# Altium PCB Adapter_XDS_110.PcbDoc
Units mm, origin at the board's own origin, x right, y up, seen from the top; angles counter-clockwise.
Board outline 19.75 x 41.19 mm, 2 copper layers (Top Layer, Bottom Layer), stack 1.621 mm thick; 12 components, 9 nets, 53 pads, 83 vias.
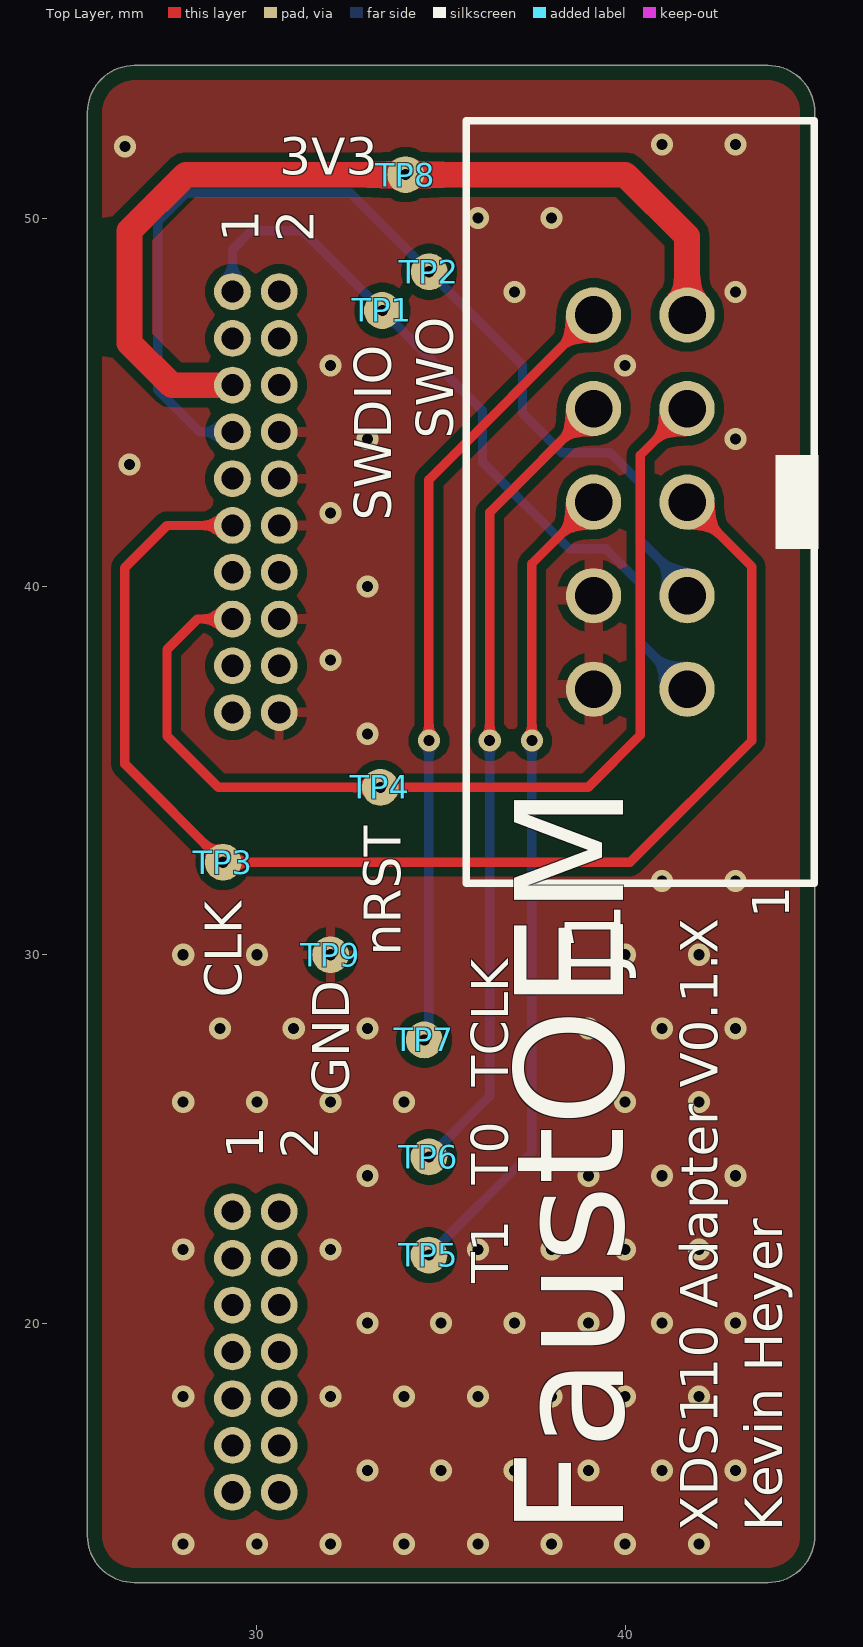
[diagram p0: Top Layer view]
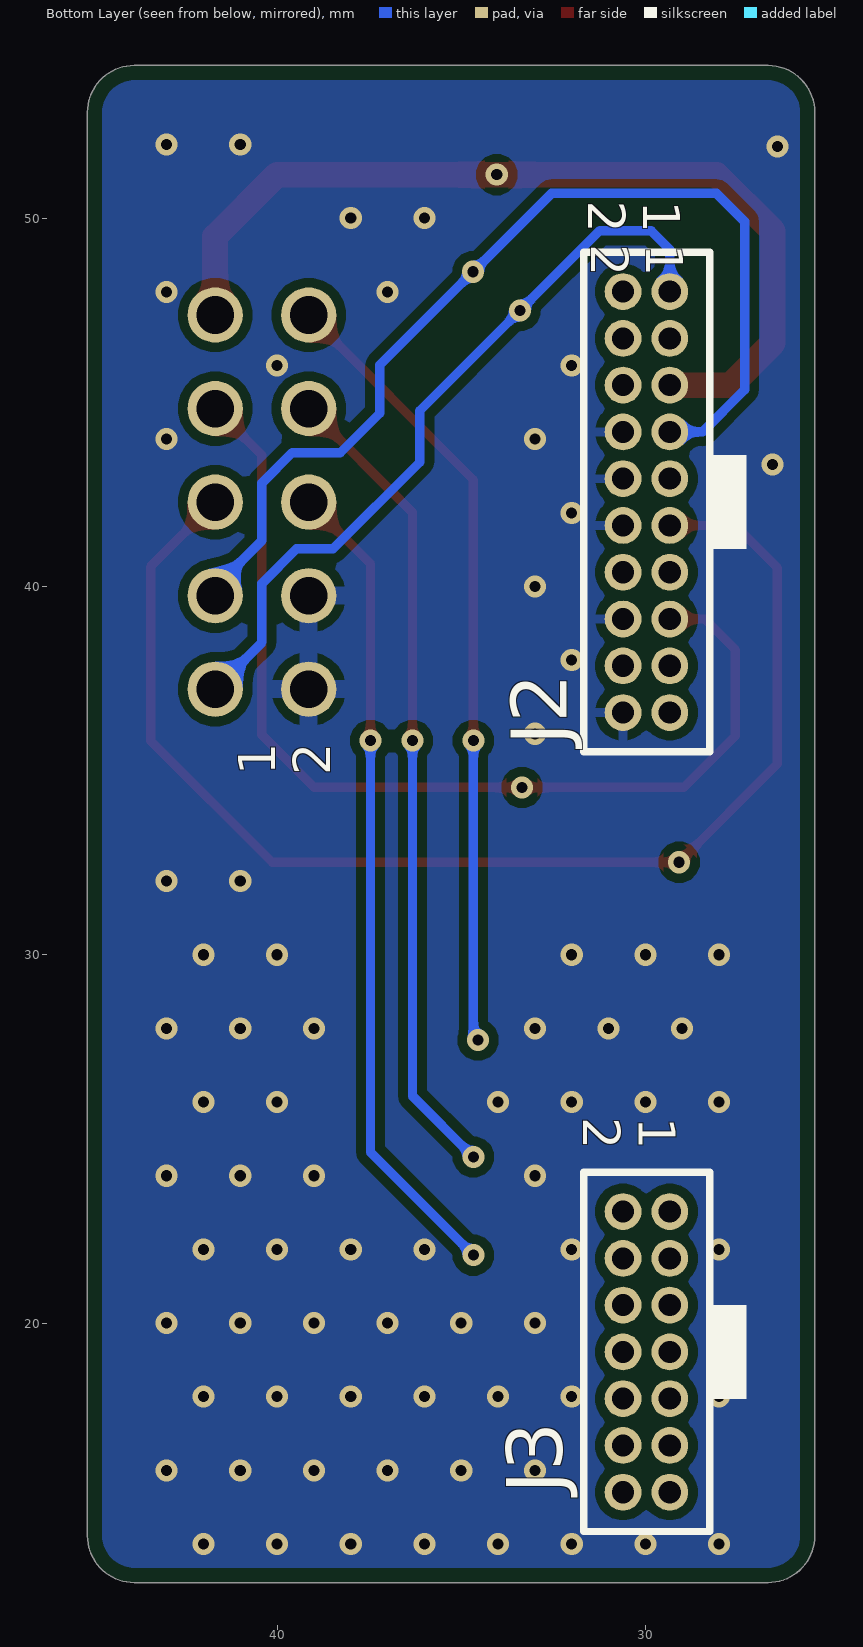
[diagram p1: Bottom Layer view, seen from below]

## Layer stack, top to bottom
Top Solder: solder mask 0.0102, Solder Resist, Dk 3.5
Top Layer: signal copper 0.0356
Dielectric 1: dielectric 1.55, FR-4, Dk 4.8
Bottom Layer: signal copper 0.0356
Bottom Solder: solder mask 0.0102, Solder Resist, Dk 3.5

## Board outline
25.4,14.224 ccw(c26.67,14.224) 26.67,12.954 43.879,12.954 ccw(c43.879,14.224) 45.149,14.224 45.149,52.877 ccw(c43.879,52.877) 43.879,54.147 26.67,54.147 ccw(c26.67,52.877) 25.4,52.877

## Design rules (kind name [scope] priority, off if disabled: settings)
BoardOutlineClearance BoardOutlineClearance_Component [IsComponent] p1: gap=0.254 ignorepadtopadclearanceinfootprint=FALSE except(0: Arc-SplitContinuation Track-SplitContinuation SMDPad-SplitContinuation THPad-SplitContinuation Via-SplitContinuation Fill-SplitContinuation Poly-SplitContinuation Region-SplitContinuation Text-SplitContinuation; 0.4: Track-OutlineEdge SMDPad-OutlineEdge THPad-OutlineEdge Via-OutlineEdge Fill-OutlineEdge Poly-OutlineEdge Region-OutlineEdge)
BoardOutlineClearance [All] p2: gap=0.254 ignorepadtopadclearanceinfootprint=FALSE except(0: Arc-SplitContinuation Track-SplitContinuation SMDPad-SplitContinuation THPad-SplitContinuation Via-SplitContinuation Fill-SplitContinuation Poly-SplitContinuation Region-SplitContinuation Text-SplitContinuation; 0.4: Track-OutlineEdge SMDPad-OutlineEdge THPad-OutlineEdge Via-OutlineEdge Fill-OutlineEdge Poly-OutlineEdge)
Clearance [All] p1: gap=0.254 ignorepadtopadclearanceinfootprint=FALSE except(0: Arc-Hole Track-Hole SMDPad-Hole THPad-Hole Via-Hole Fill-Hole Poly-Hole Region-Hole Text-Hole; 0.127: Arc-Arc Arc-Track Track-Track SMDPad-SMDPad; 0.2: SMDPad-THPad)
ComponentClearance [All] p1: gap=0.1 collisioncheckmode=3 verticalgap=0.254 showdistances=FALSE
HoleSize [All] p1: absolutevalues=TRUE maxlimit=6.3 minlimit=0.2 maxpercent=80.000 minpercent=20.000
HoleToHoleClearance [All] p1: gap=0.5 allowstackedmicrovias=TRUE
MinimumAnnularRing [All] p1: minimumring=0.13
MinimumSolderMaskSliver [All] p1: minsoldermaskwidth=0.05
PlaneConnect [All] p1: planeconnectstyle=Direct reliefexpansion=0.508 reliefentries=4 reliefconductorwidth=0.254 reliefairgap=0.254
PolygonConnect [All] p1: connectstyle=Direct reliefconductorwidth=0.254 reliefentries=4 polygonreliefangle="90 Angle" airgapwidth=0.254
RoutingVias [All] p1: holewidth=0.3 width=0.6 viastyle="Through Hole" minholewidth=0.3 minwidth=0.6 maxholewidth=6.3 maxwidth=6.3
SilkToSilkClearance [All] p1: silktosilkclearance=0
SilkToSolderMaskClearance [IsPad] p1: minsilkscreentomaskgap=0 clearancetoexposedcopper=TRUE
SolderMaskExpansion SolderMaskExpansion_via [isVia] p1: expansion=0.055 istentingtop=TRUE
SolderMaskExpansion SolderMaskExpansion_1 [All] p2: expansion=0.102 istentingtop=FALSE
Width [All] p1: maxlimit=1816.048 minlimit=0.127 preferedwidth=0.254 toplayer_maxwidth=1816.048 minimp=50.000000 maximp=50.000000 favimp=50.000000
23 further rules are at their usual default settings.

## Components (designator, comment, footprint, x,y, rotation, side; value= is the part's Value field where it differs from the comment)
J1 "TAG CONN 10" "CONN HDR RECPT 20 2.54 TH TAG CONNECT 10" 40.412,42.291 r180 top locked
J2 "20021311-00020T4LF" "CONN HDR PLUG 20 1.27 TH XDS110 DEBUG" 29.972,42.291 r0 bottom locked
J3 "20021311-00014T4LF" "CONN HDR PLUG 14 1.27 TH XDS110 AUX" 29.972,19.216 r0 bottom
TP1 "1mm" TESTPOINT_SMT 33.405,47.494 r90 top
TP2 "1mm" TESTPOINT_SMT 34.677,48.546 r90 top
TP3 "1mm" TESTPOINT_SMT 29.083,32.512 r90 top
TP4 "1mm" TESTPOINT_SMT 33.351,34.544 r90 top
TP5 "1mm" TESTPOINT_SMT 34.671,21.844 r90 top
TP6 "1mm" TESTPOINT_SMT 34.671,24.511 r90 top
TP7 "1mm" TESTPOINT_SMT 34.544,27.686 r270 top
TP8 "1mm" TESTPOINT_SMT 34.036,51.181 r270 top
TP9 "1mm" TESTPOINT_SMT 32,30 r270 top

## Footprints (in the part's own frame and the unit in brackets; to place one, negate y for a bottom-side part, rotate by r counter-clockwise, add the part's x,y. Pads: shape width x height; smd on the part's side, far side on the other; paste and mask are expansions set on the pad)
"CONN HDR PLUG 14 1.27 TH XDS110 AUX" [mm]
  round 1 hole 0.6: 1(-0.635,3.81) 2(0.635,3.81) 3(-0.635,2.54) 4(0.635,2.54) 5(-0.635,1.27) 6(0.635,1.27) 7(-0.635,0) 8(0.635,0) 9(-0.635,-1.27) 10(0.635,-1.27) 11(-0.635,-2.54) 12(0.635,-2.54) 13(-0.635,-3.81) 14(0.635,-3.81)
  silkscreen extent -2.72,-4.88 1.7,4.87, body extent -1.5,-4.68 1.5,4.67, height 4.31
"CONN HDR PLUG 20 1.27 TH XDS110 DEBUG" [mm]
  round 1 hole 0.6: 1(-0.635,-5.715) 2(0.635,-5.715) 3(-0.635,-4.445) 4(0.635,-4.445) 5(-0.635,-3.175) 6(0.635,-3.175) 7(-0.635,-1.905) 8(0.635,-1.905) 9(-0.635,-0.635) 10(0.635,-0.635) 11(-0.635,0.635) 12(0.635,0.635) 13(-0.635,1.905) 14(0.635,1.905) 15(-0.635,3.175) 16(0.635,3.175) 17(-0.635,4.445) 18(0.635,4.445) 19(-0.635,5.715) 20(0.635,5.715)
  silkscreen extent -2.72,-6.78 1.7,6.78, body extent -1.5,-6.58 1.5,6.58, height 4.31
"CONN HDR RECPT 20 2.54 TH TAG CONNECT 10" [mm]
  round 1.5 hole 1.02: 1(-1.27,5.08) 2(1.27,5.08) 3(-1.27,2.54) 4(1.27,2.54) 5(-1.27,0) 6(1.27,0) 7(-1.27,-2.54) 8(1.27,-2.54) 9(-1.27,-5.08) 10(1.27,-5.08)
  silkscreen extent -4.82,-10.35 4.73,10.35
TESTPOINT_SMT [mm] "testpoint smt"
  round 1 smd: 1(0,0)

## Part data
J1: library part "CONN HDR RECPT 10 2.54mm TH SWV", "Conn Shrouded Header HDR 10 POS 2.54mm Solder ST Thru-Hole", Color=Black, Manufacturer="On-Shore Technology", Manufacturer Part Number=302-S101, Supplier Part Number 1=ED1543-ND, Category=Connectors, ComponentLink1Description=https://datasheet.ciiva.com/732/302-sxxx-732946.pdf?src-supplier=Digi-Key, ComponentLink1URL=https://datasheet.ciiva.com/732/302-sxxx-732946.pdf?src-supplier=Digi-Key, Connector Type="Male Pin", Contact Plating=Gold, Contact Type="Male Pin", Mount="Through Hole", Number of Positions=10, Number of Rows=2, Packaging=Tray, Pitch=0.1inch, Pricing 1="1=0.29000, 10=0.24800, 100=0.19290, 500=0.16538, 1000=0.13781, 5000=0.11812, 10000=0.11025 (USD)", RoHS=Yes, Row Spacing=0.1inch, Series=302, Stock 1=61558, Supplier 1=Digi-Key, Termination=Solder
J2: library part "CONN HDR RECPT 20 1.27mm TH 20021311-00020T4LF", "Dual Row 20 Position 1.27 mm Board to Board Through Hole Female Socket Connector", Color=Black, Contact Resistance=30mR, Current Rating=1A, Manufacturer 1="Amphenol ICC / FCI", Max Operating Temperature=85°C, Max Voltage Rating (AC)=125V, Min Operating Temperature=-40°C, Package Quantity=45, Supplier Part Number 1=82R8663, Category 1=Connectors, ComponentLink1Description=http://www.alliedelec.com/m/d/a3245b736a91ce97db4107bcd031e553.pdf?src-supplier=Allied+Electronics, ComponentLink1URL=http://www.alliedelec.com/m/d/a3245b736a91ce97db4107bcd031e553.pdf?src-supplier=Allied+Electronics, ComponentLink2Description=https://www.verical.com/server-webapp/html/getDatasheet?partID=356979&src-supplier=Verical, ComponentLink2URL=https://www.verical.com/server-webapp/html/getDatasheet?partID=356979&src-supplier=Verical, ComponentLink3Description=http://portal.fciconnect.com/Comergent/fci/drawing/20021311.pdf?src-supplier=Avnet, ComponentLink3URL=http://portal.fciconnect.com/Comergent/fci/drawing/20021311.pdf?src-supplier=Avnet, ComponentLink4Description=http://portal.fciconnect.com/Comergent//fci/drawing/20021311.pdf?src-supplier=Mouser, ComponentLink4URL=http://portal.fciconnect.com/Comergent//fci/drawing/20021311.pdf?src-supplier=Mouser, ComponentLink5Description=http://www.farnell.com/cad/1750102.pdf?src-supplier=Element14, ComponentLink5URL=http://www.farnell.com/cad/1750102.pdf?src-supplier=Element14, ComponentLink6Description=http://components.arrow.com/part/dataview/48963304S8522655N8314?src-supplier=Arrow+Electronics, ComponentLink6URL=http://components.arrow.com/part/dataview/48963304S8522655N8314?src-supplier=Arrow+Electronics, ComponentLink7Description=http://www.farnell.com/datasheets/2374175.pdf?src-supplier=Farnell, ComponentLink7URL=http://www.farnell.com/datasheets/2374175.pdf?src-supplier=Farnell, ComponentLink8Description=https://media.digikey.com/pdf/Data%20Sheets/FCI%20PDFs/Minitek%20127_Catalog.pdf?src-supplier=Digi-Key, ComponentLink8URL=https://media.digikey.com/pdf/Data%20Sheets/FCI%20PDFs/Minitek%20127_Catalog.pdf?src-supplier=Digi-Key, Connector Type=Receptacle, Contact Material="Copper Alloy,Copper", Contact Plating=Gold, Contact Type="Female Socket", Depth=3mm, Description 1="Dual Row 20 Position 1.27 mm Board to Board Through Hole Female Socket Connector", Gender=Receptacle, Housing Material=Plastic, Length=11.43mm, Manufacturer Part Number 1=20021311-00020T4LF, Mounting Technology="Through Hole", Number of Contacts=20, Number of Positions=20, Number of Rows=2, Orientation=Straight, Packaging=Rail/Tube, Pitch=1.27mm, Radiation Hardening=No, Reach SVHC Compliant=Yes, RoHS 1=Yes, Row Spacing=0.05inch, Series="Minitek 127® 20021311", Supplier 1=Newark, Termination=Solder, Voltage Rating=125V
J3: library part "CONN HDR RECPT 14 1.27mm TH 20021311-00014T4LF", "1.27mm (0.05in.) pitch, Receptacle Top entry, 14 contacts", Color=Black, Contact Resistance=30mR, Current Rating=1A, Manufacturer 1="Amphenol ICC / FCI", Max Operating Temperature=85°C, Max Voltage Rating (AC)=125V, Min Operating Temperature=-40°C, Package Quantity=63, Supplier Part Number 1=39AJ1937, Category 1=Connectors, ComponentLink1Description=https://datasheet.ciiva.com/411/20021311-411141.pdf?src-supplier=Digi-Key, ComponentLink1URL=https://datasheet.ciiva.com/411/20021311-411141.pdf?src-supplier=Digi-Key, ComponentLink2Description=https://datasheet.ciiva.com/13874/20021311-13874918.pdf?src-supplier=Mouser, ComponentLink2URL=https://datasheet.ciiva.com/13874/20021311-13874918.pdf?src-supplier=Mouser, ComponentLink3Description=https://datasheet.ciiva.com/10135/20021311-10135351.pdf?src-supplier=Avnet, ComponentLink3URL=https://datasheet.ciiva.com/10135/20021311-10135351.pdf?src-supplier=Avnet, Connector Type=Receptacle, Contact Material="Copper Alloy", Contact Plating=Gold, Contact Type="Female Socket", Depth=3mm, Description 1="1.27mm (0.05in.) pitch, Receptacle Top entry, 14 contacts", Gender=Female, Housing Material=Plastic, Length=7.62mm, Manufacturer Part Number 1=20021311-00014T4LF, Mounting Technology="Through Hole", Number of Contacts=14, Number of Positions=14, Number of Rows=2, Orientation=Straight, Packaging=Rail/Tube, Pitch=1.27mm, RoHS 1=Yes, RoHS Compliant=Yes, Row Spacing=0.05inch, Series="Minitek 127® 20021311", Supplier 1=Newark, Termination=Solder, Voltage Rating=125V
TP1 TP2 TP3 TP4 TP5 TP6 TP7 TP8 TP9: library part "TP 1mm", "SMT testpoint"

## Via types
v1: diameter 0.6, hole 0.3, Top Layer to Bottom Layer, tented both sides, 83 vias

## Nets (pads, with @x,y where several pads share a name; then routed paths per layer and width w, separated by ;. In a path a pad name is that pad's centre, name@x,y a point inside that pad or via, vN(x,y) a via of type N, cw(c..) or ccw(c..) an arc to the next point about the centre after c; other vN are vias at no path point)
3V3: J1.9 J2.5 TP8.1 | length 25.1
  Top Layer w0.7: J2.5 27.686,45.466 26.543,46.609 26.543,49.657 28.067,51.181 40.005,51.181 41.682,49.504 J1.9@41.682,47.191
  other v1: 34.036,51.181
GND: J1.2 J1.4 J2.8 J2.10 J2.12 J2.16 J2.20 TP9.1
  other v1: 28,14 30,14 32,14 34,14 36,14 38,14 40,14 42,14 33,16 35,16 37,16 39,16 41,16 43,16 28,18 32,18 34,18 36,18 38,18 40,18 42,18 33,20 35,20 37,20 39,20 41,20 43,20 28,22 32,22 36,22 38,22 40,22 42,22 33,24 39,24 41,24 43,24 28,26 30,26 32,26 34,26 40,26 42,26 29,28 31,28 33,28 39,28 41,28 43,28 28,30 30,30 32,30 40,30 42,30 41,32 43,32 33,36 32,38 33,40 32,42 26.543,43.307 33,44 43,44 32,46 40,46 37,48 43,48 36,50 38,50 26.416,51.943 41,52 43,52
nRST: J1.7 J2.15 TP4.1 | length 27.9
  Top Layer w0.254: J2.15 28.39,39.116 27.559,38.286 27.559,35.941 28.956,34.544 38.989,34.544 40.412,35.967 40.412,43.561 J1.7
  other v1: 33.351,34.544
SWCLK: J1.5 J2.11 TP3.1 | length 35.4
  Top Layer w0.254: J2.11 27.559,41.656 26.416,40.513 26.416,35.179 v1(29.083,32.512) 40.132,32.512 43.434,35.814 43.434,40.539 J1.5
SWDIO: J1.1 J2.1 TP1.1 | length 20.6
  Bottom Layer w0.254: J2.1 29.337,49.149 29.845,49.657 31.242,49.657 36.126,44.773 36.126,43.376 38.481,41.021 39.471,41.021 40.412,40.08 40.412,38.481 J1.1
  other v1: 33.405,47.494
SWO: J1.3 J2.7 TP2.1 | length 28.1
  Bottom Layer w0.254: J2.7 28.448,44.196 27.305,45.339 27.305,49.911 28.067,50.673 32.55,50.673 37.211,46.012 37.211,44.704 38.285,43.63 39.593,43.63 40.412,42.811 40.412,41.249 41.682,39.979 J1.3
  other v1: 34.677,48.546
TRACE0: J1.8 TP6.1 | length 22.2
  Top Layer w0.254: v1(36.322,35.814) 36.322,42.011 J1.8
  Bottom Layer w0.254: v1(34.671,24.511) 36.322,26.162 v1(36.322,35.814)
TRACE1: J1.6 TP5.1 | length 22.3
  Top Layer w0.254: v1(37.465,35.814) 37.465,40.614 J1.6
  Bottom Layer w0.254: v1(34.671,21.844) 37.465,24.638 v1(37.465,35.814)
TRACE_CLK: J1.10 TP7.1 | length 21.6
  Top Layer w0.254: v1(34.671,35.814) 34.671,42.9 J1.10
  Bottom Layer w0.254: v1(34.544,27.686) 34.544,27.78 34.671,27.907 v1(34.671,35.814)
pads on no net: J2.2 J2.3 J2.4 J2.6 J2.9 J2.13 J2.14 J2.17 J2.18 J2.19 J3.1 J3.2 J3.3 J3.4 J3.5 J3.6 J3.7 J3.8 J3.9 J3.10 J3.11 J3.12 J3.13 J3.14

## Polygon pours and split planes (outlines as drawn)
GND on Top Layer "NONET_L-01_P-001" (solid, remove dead copper, pour order 0): 25.4,14.224 ccw(c26.67,14.224) 26.67,12.954 45.879,12.954 ccw(c45.879,14.224) 47.149,14.224 47.149,52.877 ccw(c45.879,52.877) 45.879,54.147 26.67,54.147 ccw(c26.67,52.877) 25.4,52.877
GND on Bottom Layer "NONET_L-01_P-001" (solid, remove dead copper, pour order 1): 25.4,14.224 ccw(c26.67,14.224) 26.67,12.954 45.879,12.954 ccw(c45.879,14.224) 47.149,14.224 47.149,52.877 ccw(c45.879,52.877) 45.879,54.147 26.67,54.147 ccw(c26.67,52.877) 25.4,52.877

## Silkscreen, mask and mechanical layers (free items; w line width, h text height)
Top Overlay:
  text "3V3" at 30.607,51.181 h1
  text "1 / 2" at 31.55,49.349 h1 r90
  text "SWO" at 35.333,44.015 h1 r90
  text "SWDIO" at 33.655,41.783 h1 r90
  text "1" at 44.45,30.988 h1 r90
  text "nRST" at 33.909,29.972 h1 r90
  text "CLK" at 29.591,28.829 h1 r90
  text "TCLK" at 36.83,26.416 h1 r90
  text "GND" at 32.512,26.162 h1 r90
  text "1 / 2" at 31.669,24.465 h1 r90
  text "T0" at 36.83,23.749 h1 r90
  text "T1" at 36.83,21.082 h1 r90
  text "XDS110 Adapter V0.1.X / Kevin Heyer" at 44.609,14.351 h1.75 r90
  text "FaustOEM" at 40.926,14.224 h5.08 r90
Bottom Overlay:
  text "1 / 2" at 31.554,50.477 h1 r90
  text "1 / 2" at 31.471,49.289 h1 r90
  text "1 / 2" at 38.55,34.867 h1 r270
  text "1 / 2" at 31.681,25.585 h1 r90
Board:
  the board outline again, w0.2
Fab Notes:
  lines w0.381: 104.149,36.703 114.56,36.703 138.176,36.703 160.014,36.703 176.52,36.703 190.994,36.703 ; 104.149,39.751 114.56,39.751 138.176,39.751 160.014,39.751 176.52,39.751 190.994,39.751 ; 104.149,42.799 114.56,42.799 138.176,42.799 160.014,42.799 176.52,42.799 190.994,42.799 ; 104.149,45.847 114.56,45.847 138.176,45.847 160.014,45.847 176.52,45.847 190.994,45.847 ; 104.149,48.895 114.56,48.895 138.176,48.895 160.014,48.895 176.52,48.895 190.994,48.895 ; 104.149,51.943 114.56,51.943 138.176,51.943 160.014,51.943 176.52,51.943 190.994,51.943 ; 104.149,54.991 190.994,54.991 ; 114.56,58.039 114.56,33.655 ; 138.176,58.039 138.176,33.655 ; 160.014,58.039 160.014,33.655 ; 176.52,58.039 176.52,33.655 ; 114.56,33.655 104.149,33.655 104.149,58.039 190.994,58.039 190.994,33.655 176.52,33.655 ; 114.56,33.655 138.176,33.655 ; 138.176,33.655 160.014,33.655 ; 160.014,33.655 176.52,33.655
  text "Layer" at 105.927,55.753 h1.52
  text "Name" at 116.338,55.753 h1.52
  text "Material" at 139.954,55.753 h1.52
  text "Thickness" at 161.792,55.753 h1.52
  text "Constant" at 178.298,55.753 h1.52
  text "Top Overlay" at 116.338,52.705 h1.52
  text "Top Solder" at 116.338,49.657 h1.52
  text "Solder Resist" at 139.954,49.657 h1.52
  text "0.010mm" at 161.792,49.657 h1.52
  text "3.5" at 178.298,49.657 h1.52
  text "1" at 105.927,46.609 h1.52
  text "Top Layer" at 116.338,46.609 h1.52
  text "0.036mm" at 161.792,46.609 h1.52
  text "Dielectric 1" at 116.338,43.561 h1.52
  text "FR-4" at 139.954,43.561 h1.52
  text "1.550mm" at 161.792,43.561 h1.52
  text "4.8" at 178.298,43.561 h1.52
  text "2" at 105.927,40.513 h1.52
  text "Bottom Layer" at 116.338,40.513 h1.52
  text "0.036mm" at 161.792,40.513 h1.52
  text "Bottom Solder" at 116.338,37.465 h1.52
  text "Solder Resist" at 139.954,37.465 h1.52
  text "0.010mm" at 161.792,37.465 h1.52
  text "3.5" at 178.298,37.465 h1.52
  text "Bottom Overlay" at 116.338,34.417 h1.52
  text "Total board thickness:" at 105.927,31.369 h1.52
  text "1.641mm" at 161.792,31.369 h1.52
Drill Drawing:
  circle w0.254: c91.128,78.317 r0.847
  lines w0.254: 90.281,81.703 90.704,81.703 91.128,81.28 91.551,81.703 91.974,81.703 91.551,82.127 91.974,82.55 91.551,82.55 91.128,82.973 90.704,82.55 90.281,82.55 90.704,82.127 90.281,81.703 ; 90.281,85.09 91.974,85.09 91.974,86.783 90.281,86.783 90.281,85.09
  lines w0.381: 88.762,76.327 231.37,76.327 ; 88.762,87.757 231.37,87.757 ; 102.755,72.517 102.755,91.567 ; 117.737,72.517 117.737,91.567 ; 145.669,72.517 145.669,91.567 ; 158.518,72.517 158.518,91.567 ; 177.156,72.517 177.156,91.567 ; 215.245,72.517 215.245,91.567 ; 88.762,72.517 231.37,72.517 231.37,91.567 88.762,91.567 88.762,72.517
  text "Symbol" at 91.048,88.9 h1.83
  text "Count" at 103.898,88.9 h1.83
  text "Hole Size" at 118.88,88.9 h1.83
  text "Plated" at 146.812,88.9 h1.83
  text "Hole Type" at 159.661,88.9 h1.83
  text "Drill Layer Pair" at 178.299,88.9 h1.83
  text "Via/Pad" at 216.388,88.9 h1.83
  text "83" at 103.898,85.09 h1.52
  text "0.300mm (11.81mil)" at 118.88,85.09 h1.52
  text "PTH" at 146.812,85.09 h1.52
  text "Round" at 159.661,85.09 h1.52
  text "Top Layer - Bottom Layer" at 178.299,85.09 h1.52
  text "Via" at 216.388,85.09 h1.52
  text "34" at 103.898,81.28 h1.52
  text "0.600mm (23.62mil)" at 118.88,81.28 h1.52
  text "PTH" at 146.812,81.28 h1.52
  text "Round" at 159.661,81.28 h1.52
  text "Top Layer - Bottom Layer" at 178.299,81.28 h1.52
  text "Pad" at 216.388,81.28 h1.52
  text "10" at 103.898,77.47 h1.52
  text "1.020mm (40.16mil)" at 118.88,77.47 h1.52
  text "PTH" at 146.812,77.47 h1.52
  text "Round" at 159.661,77.47 h1.52
  text "Top Layer - Bottom Layer" at 178.299,77.47 h1.52
  text "Pad" at 216.388,77.47 h1.52
  text "127 Total" at 103.898,73.66 h1.52

## Dimensions
25.4,52.877 to 45.149,52.877 on Fab Notes
43.879,54.147 to 43.879,12.954 on Fab Notes